# Altium PCB AVRTankPcb.PcbDoc
Units mil, origin at the board's own origin, x right, y up, seen from the top; angles counter-clockwise.
Board outline 2160 x 2180 mil, 2 copper layers (Top Layer, Bottom Layer); 18 components, 14 nets, 59 pads, 0 vias.
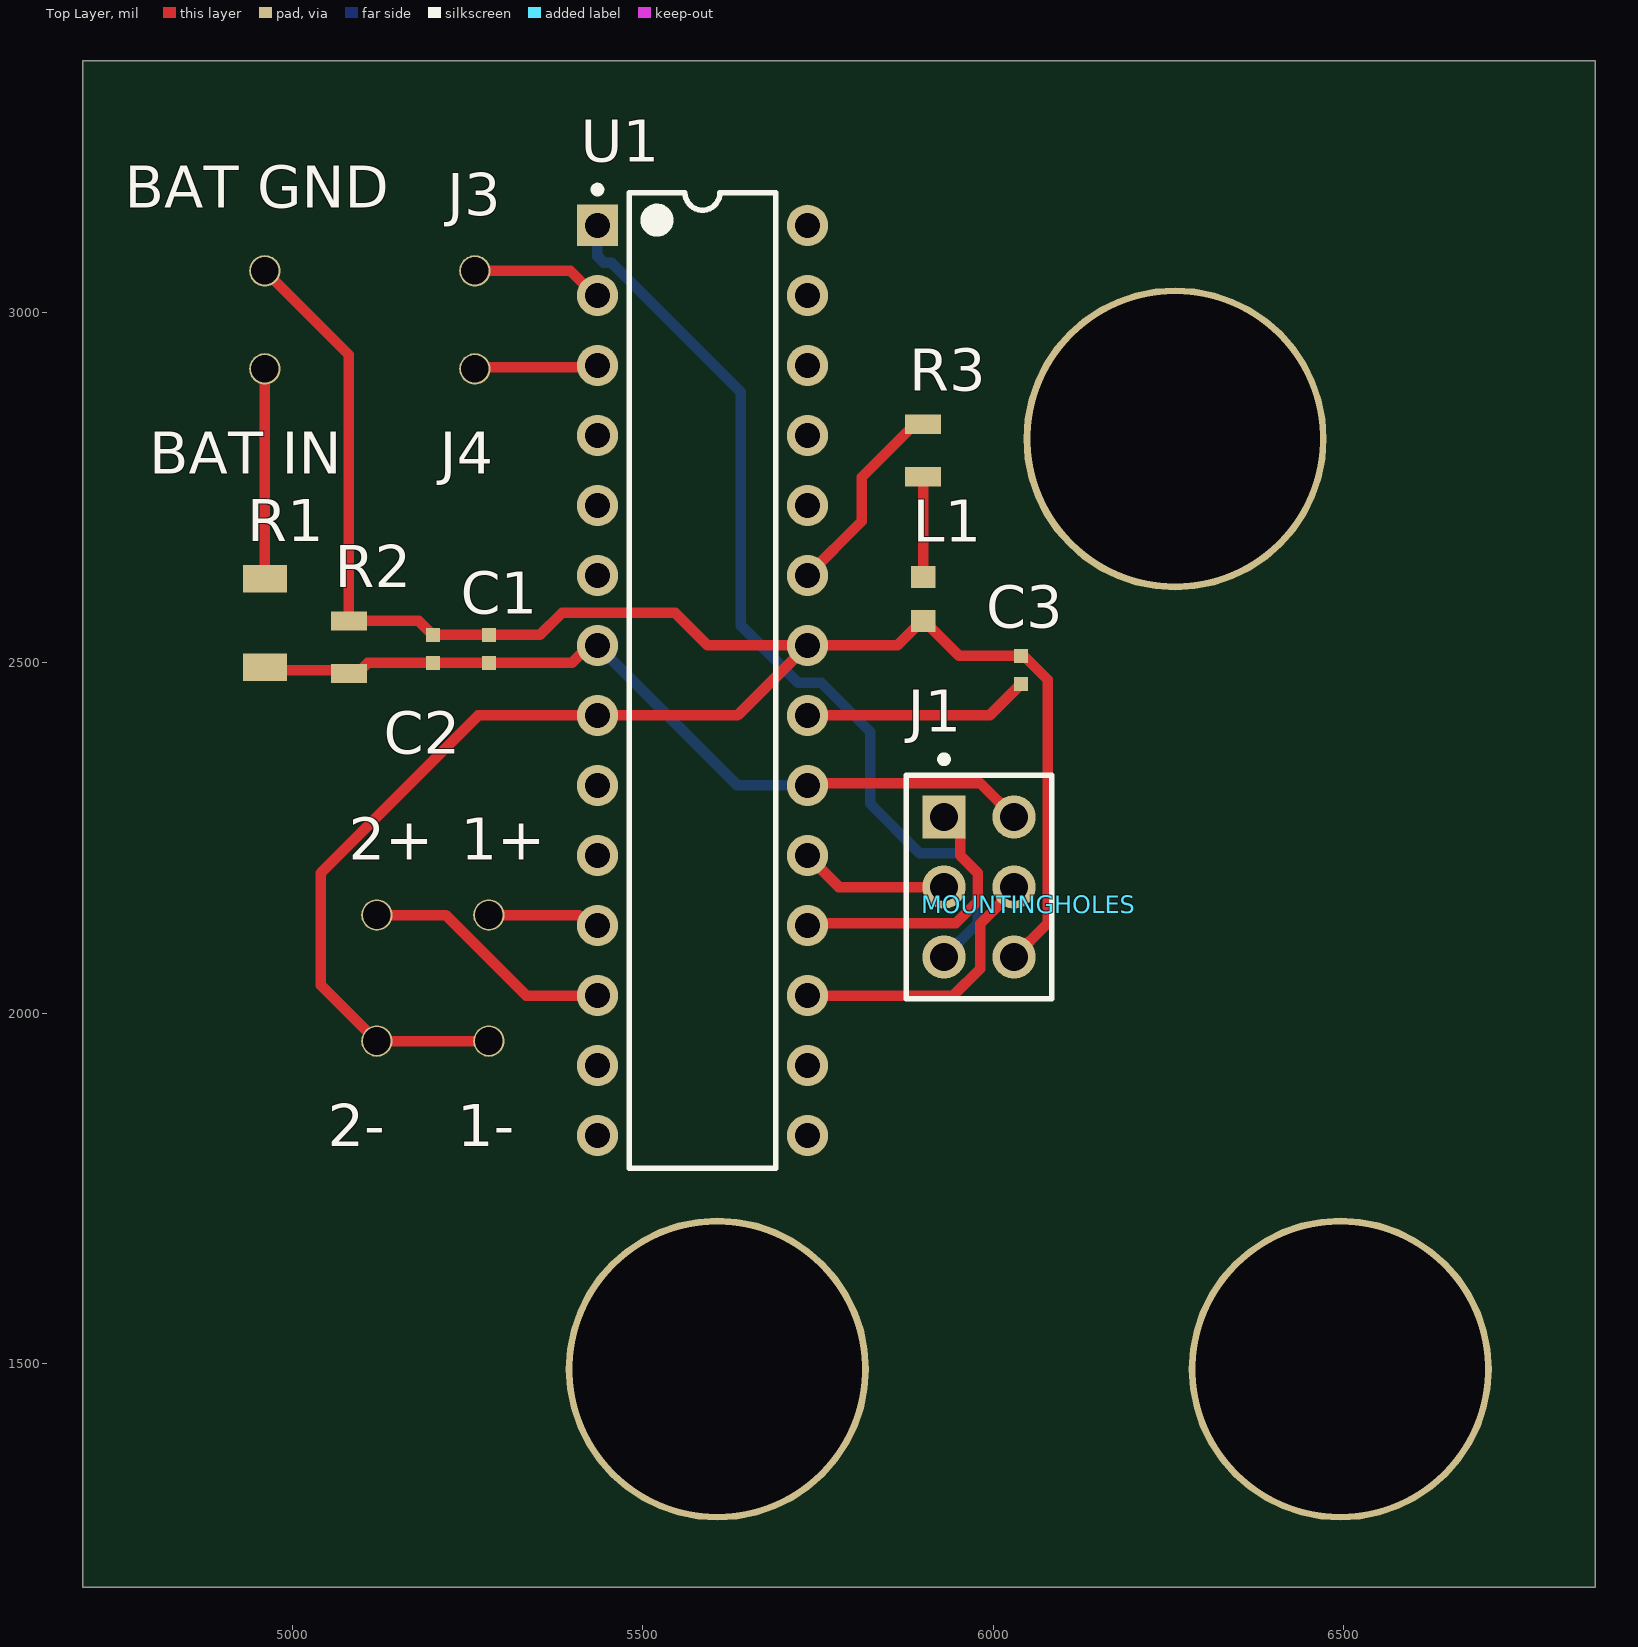
[diagram p0: Top Layer view]
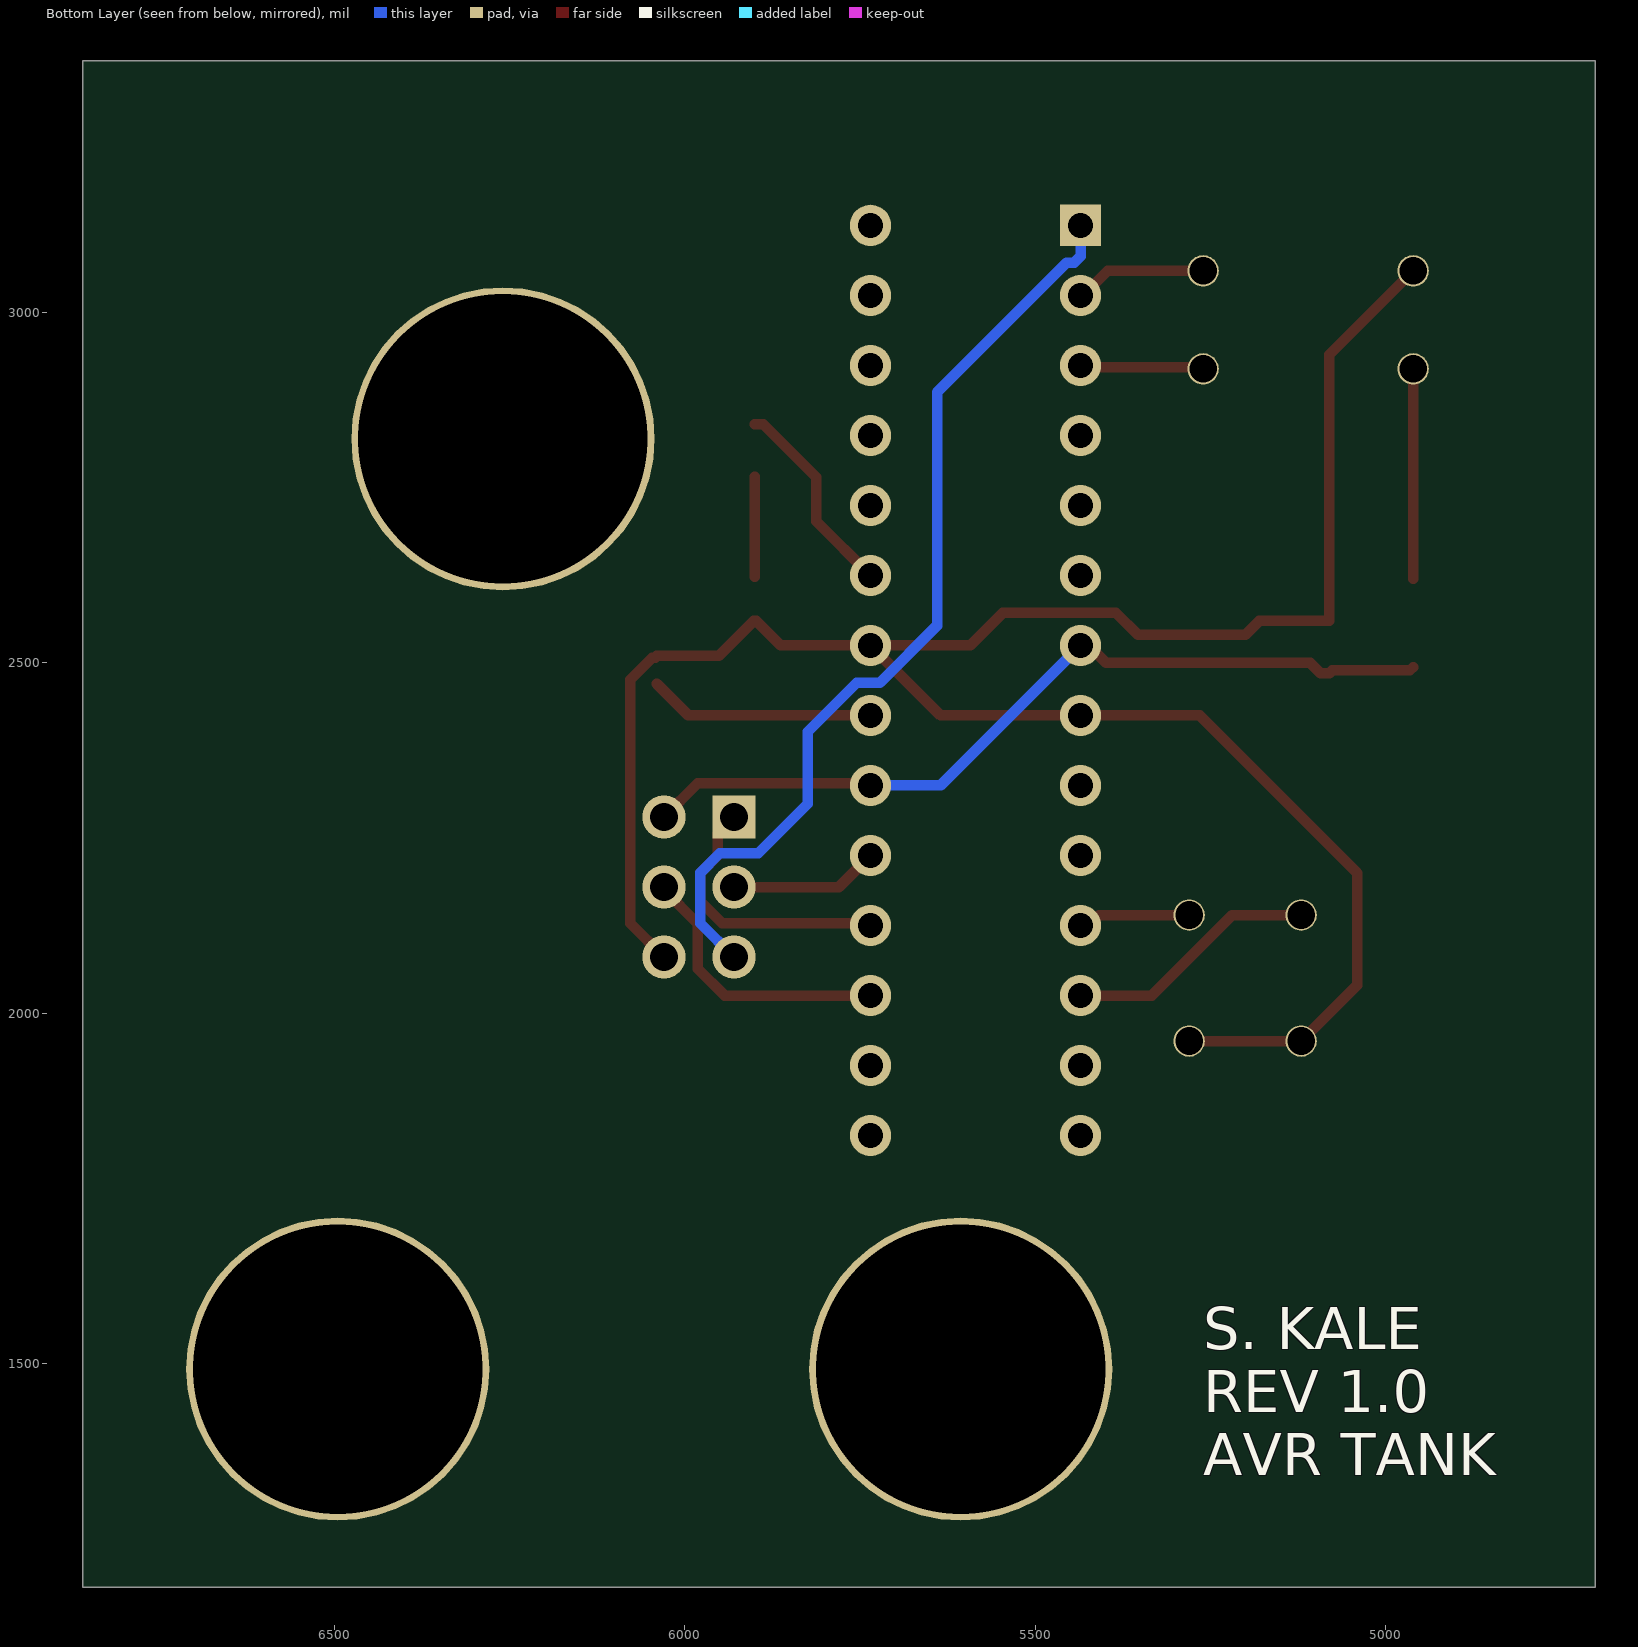
[diagram p1: Bottom Layer view, seen from below]
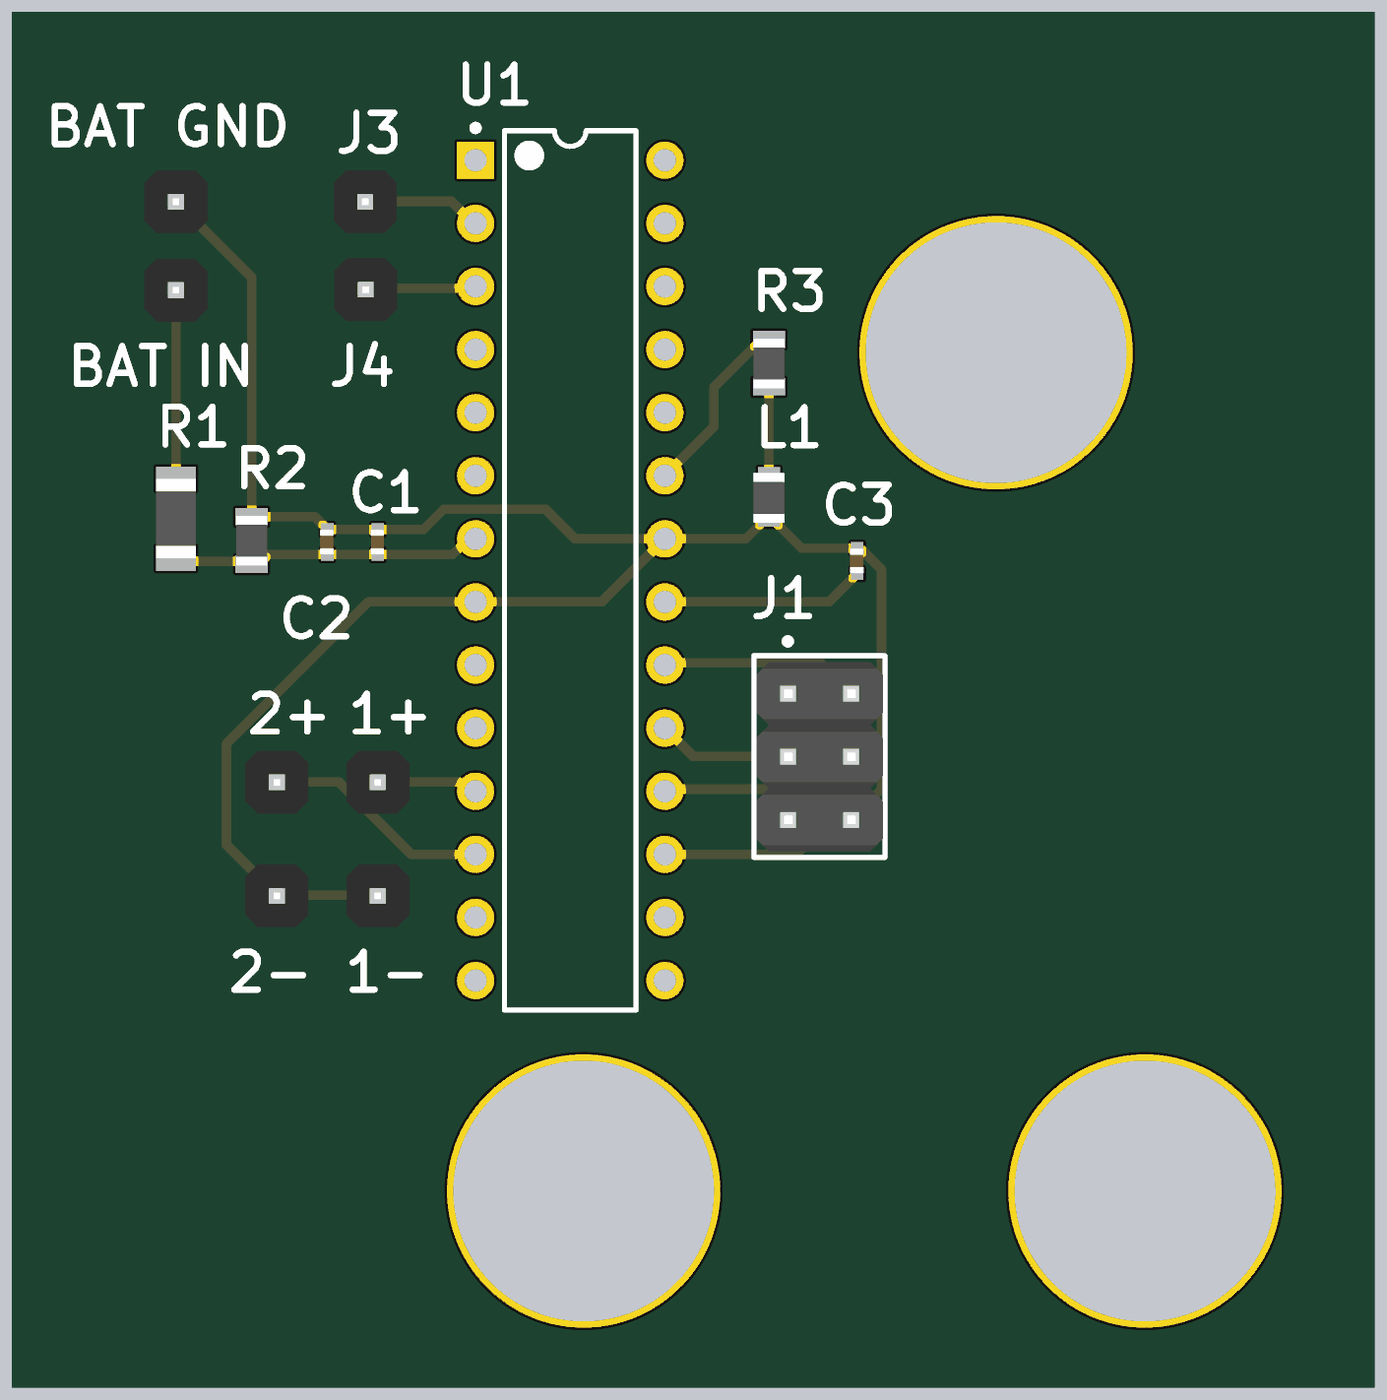
[diagram p2: 3D render of the assembled board from above, using the file's embedded part models]

## Layer stack, top to bottom
Top Solder: solder mask 0.4, Solder Resist, Dk 3.5
Top Layer: signal copper 1.4
Dielectric 1: dielectric 12.6, FR-4, Dk 4.8
Bottom Layer: signal copper 1.4
Bottom Solder: solder mask 0.4, Solder Resist, Dk 3.5

## Board outline
4700,1180 6860,1180 6860,3360 4700,3360

## Design rules (kind name [scope] priority, off if disabled: settings)
Clearance [All] p1: gap=10 ignorepadtopadclearanceinfootprint=FALSE except(0: Arc-Hole Track-Hole SMDPad-Hole THPad-Hole Via-Hole Fill-Hole Poly-Hole Region-Hole Text-Hole)
PolygonConnect [All] p1: connectstyle=Relief reliefconductorwidth=10 reliefentries=4 polygonreliefangle="90 Angle" airgapwidth=10
RoutingVias [All] p1: holewidth=28 width=50 viastyle="Through Hole" minholewidth=28 minwidth=50 maxholewidth=28 maxwidth=50
SolderMaskExpansion [All] p1: expansion=4 istentingtop=FALSE
Width [All] p1: maxlimit=15 minlimit=15 preferedwidth=15 minimp=50.000000 maximp=50.000000 favimp=50.000000
30 further rules are at their usual default settings.

## Components (designator, comment, footprint, x,y, rotation, side; value= is the part's Value field where it differs from the comment)
1+ "MOTOR 1 +" PIN_HEADER 5280,2140 r0 top (schematic designator J7)
1- "MOTOR 1 -" PIN_HEADER 5280,1960 r0 top (schematic designator J8)
2+ "MOTOR 2 +" PIN_HEADER 5120,2140 r0 top (schematic designator J9)
2- "MOTOR 2 -" PIN_HEADER 5120,1960 r0 top (schematic designator J10)
"BAT GND" "BATT GND" PIN_HEADER 4960,3060 r0 top (schematic designator J6)
"BAT IN" "BATT IN" PIN_HEADER 4960,2920 r0 top (schematic designator J5)
C1 "CAP 0.1uF" CAP0.1uF 5280,2510 r90 top
C2 "CAP 0.1uF" CAP0.1uF 5200,2510 r90 top
C3 "CAP 0.1uF" CAP0.1uF 6040,2480 r90 top
J1 "M20-9980346" FP-M20-9980346-MFG 5980,2180 r270 top
J3 "DBG RX" PIN_HEADER 5260,3060 r0 top
J4 "DBG TX" PIN_HEADER 5260,2920 r90 top
L1 "150060GS75000" 150060GS75000 5900,2560 r90 top
MOUNTINGHOLES "MOUNTING HOLES" "MOUNTING HOLES" 6496.22,1481.42 r0 top
R1 "RES 6.8 Ω" "RES 6.8 OHM" 4960,2494.02 r90 top
R2 "RES 30 OHM" "RES 30 OHM" 5080,2498.98 r90 top
R3 "RES 30 Ω" "RES 30 OHM" 5900,2780 r90 top
U1 "ATMEGA328-PU" ATMEGA328-PU 5580,2480 r0 top

## Footprints (in the part's own frame and the unit in brackets; to place one, negate y for a bottom-side part, rotate by r counter-clockwise, add the part's x,y. Pads: shape width x height; smd on the part's side, far side on the other; paste and mask are expansions set on the pad)
150060GS75000 [mm]
  rect 0.8x0.889 smd: 1(0,0) 2(1.6,0)
  body extent -0.24,-0.62 1.76,0.63, height 0.6
ATMEGA328-PU [mm]
  rect 1.5x1.5 hole 0.9: 1(-3.683,16.383)
  round 1.5 hole 0.9: 2(-3.683,13.843) 3(-3.683,11.303) 4(-3.683,8.763) 5(-3.683,6.223) 6(-3.683,3.683) 7(-3.683,1.143) 8(-3.683,-1.397) 9(-3.683,-3.937) 10(-3.683,-6.477) 11(-3.683,-9.017) 12(-3.683,-11.557) 13(-3.683,-14.097) 14(-3.683,-16.637) 15(3.937,-16.637) 16(3.937,-14.097) 17(3.937,-11.557) 18(3.937,-9.017) 19(3.937,-6.477) 20(3.937,-3.937) 21(3.937,-1.397) 22(3.937,1.143) 23(3.937,3.683) 24(3.937,6.223) 25(3.937,8.763) 26(3.937,11.303) 27(3.937,13.843) 28(3.937,16.383)
  silkscreen extent -3.81,-17.83 2.78,17.81, body extent -3.47,-17.78 3.73,17.52, height 4.58
CAP0.1uF [mm]
  rect 0.5x0.5 smd: 1(-0.254,0) 2(0.762,0)
  body extent -0.25,-0.25 0.75,0.3, height 0.48
FP-M20-9980346-MFG [mm]
  rect 1.57x1.57 hole 1.02 paste-1000 mask+0: 1(-2.54,-1.27)
  round 1.57 hole 1.02 paste-1000 mask+0: 2(-2.54,1.27) 3(0,-1.27) 4(0,1.27) 5(2.54,-1.27) 6(2.54,1.27)
  silkscreen extent -4.76,-2.64 4.06,2.64, body extent -4.16,-2.74 4.16,2.74, height 0.25
"MOUNTING HOLES" [mm]
  round 11 hole 10.5: 8(-22.606,0.254) 9(-6,34) 9(-0.006,0.254)
PIN_HEADER [mil]
  round 45 hole 39.37: 1(0,0)
  body extent -50,-51 50,49, height 330
"RES 6.8 OHM" [mm]
  rect 1x1.6 smd: 1(0,0) 2(3.2,0)
  body extent 0,-0.8 3.2,0.8, height 0.7
"RES 30 OHM" [mm]
  rect 0.7x1.3 smd: 1(1.55,0) 2(-0.356,0)
  body extent -0.42,-0.62 1.58,0.63, height 0.6

## Part data
1+ 1- 2+ 2- "BAT GND" "BAT IN" J3 J4: library part PIN_HEADER, "Board Connector, 1 Contact(s), 1 Row(s), Male, Straight, Solder Terminal", Flammability Rating="UL94 V-0", Manufacturer=Sullins, Manufacturer Part Number=PREC001SAAN-RC, Supplier Part Number 1=S1012EC-01-ND, Category=Connectors, ComponentLink1Description=https://datasheet.ciiva.com:443/pdfs/VipMasterIC/IC/SUCS/SUCS-S-A0005121173/SUCS-S-A0005121173-1.pdf?src-supplier=IHS+Markit, ComponentLink1URL=https://datasheet.ciiva.com:443/pdfs/VipMasterIC/IC/SUCS/SUCS-S-A0005121173/SUCS-S-A0005121173-1.pdf?src-supplier=IHS+Markit, ComponentLink2Description=https://datasheet.ciiva.com/740/zrzczzzszzn-rc-st-11635-b-740844.pdf?src-supplier=Digi-Key, ComponentLink2URL=https://datasheet.ciiva.com/740/zrzczzzszzn-rc-st-11635-b-740844.pdf?src-supplier=Digi-Key, Connector Type="BOARD CONNECTOR", Contact Gender=Male, DIN Conformance=No, Filter Feature=No, IEC Conformance=No, MIL Conformance=No, Mixed Contacts=No, Mount=Board, Mounting Style=STRAIGHT, Number Of Contacts=1, Number of Rows Loaded=1, Option="General Purpose", Pricing 1="1=0.04000, 10=0.03000, 25=0.02800, 50=0.02080, 100=0.01780, 250=0.01724, 500=0.01486 (USD)", RoHS=Yes, Stock 1=16681, Supplier 1=Digi-Key, Termination=Solder
C1 C2 C3: "Ceramic Capacitor, Multilayer, Ceramic, 16V, 10% +Tol, 10% -Tol, X7R, 15% TC, 0.1uF, Surface Mount, 0402", Capacitance=100nF, Capacitor Type=Ceramic, Manufacturer=Murata, Manufacturer Part Number=GRM155R71C104KA88D, Max Operating Temperature=125°C, Min Operating Temperature=-55°C, Negative Tolerance=10%, Package Shape=Rectangular, Package Style=SMTMeter, Rated DC Voltage (URdc)=16V, Supplier Part Number 1=490-3261-1-ND, Temperature Characteristics Code=X7R, Category="Ceramic Capacitors", ComponentLink1Description=https://psearch.en.murata.com:443/capacitor/product/GRM155R71C104KA88%23.pdf?src-supplier=IHS+Markit, ComponentLink1URL=https://psearch.en.murata.com:443/capacitor/product/GRM155R71C104KA88%23.pdf?src-supplier=IHS+Markit, ComponentLink2Description=https://datasheet.ciiva.com/129/grm155r71c104ka88-01-129740.pdf?src-supplier=Digi-Key, ComponentLink2URL=https://datasheet.ciiva.com/129/grm155r71c104ka88-01-129740.pdf?src-supplier=Digi-Key, ComponentLink3Description=https://datasheet.ciiva.com/18102/getdatasheetpartid-85307-18102905.pdf?src-supplier=Verical, ComponentLink3URL=https://datasheet.ciiva.com/18102/getdatasheetpartid-85307-18102905.pdf?src-supplier=Verical, ComponentLink4Description=https://datasheet.ciiva.com/129/grm155r71c104ka88-01-129739.pdf?src-supplier=Digi-Key, ComponentLink4URL=https://datasheet.ciiva.com/129/grm155r71c104ka88-01-129739.pdf?src-supplier=Digi-Key, ComponentLink5Description=https://datasheet.ciiva.com/29199/454098-da-01-en-vs-kondensator-0402-29199799.pdf?src-supplier=Conrad, ComponentLink5URL=https://datasheet.ciiva.com/29199/454098-da-01-en-vs-kondensator-0402-29199799.pdf?src-supplier=Conrad, ComponentLink6Description=https://datasheet.ciiva.com/28534/4360-28534133.pdf?src-supplier=Element14, ComponentLink6URL=https://datasheet.ciiva.com/28534/4360-28534133.pdf?src-supplier=Element14, ComponentLink7Description=https://datasheet.ciiva.com/14103/grmseries-highdielectrictype-eng-14103750.pdf?src-supplier=Distrelec, ComponentLink7URL=https://datasheet.ciiva.com/14103/grmseries-highdielectrictype-eng-14103750.pdf?src-supplier=Distrelec, ComponentLink8Description=https://datasheet.ciiva.com/16199/product-16199000.pdf?src-supplier=Future+Electronics, ComponentLink8URL=https://datasheet.ciiva.com/16199/product-16199000.pdf?src-supplier=Future+Electronics, ComponentLink9Description=https://datasheet.ciiva.com/14116/grmseries-highdielectrictype-eng-14116878.pdf?src-supplier=Distrelec, ComponentLink9URL=https://datasheet.ciiva.com/14116/grmseries-highdielectrictype-eng-14116878.pdf?src-supplier=Distrelec, ComponentLink10Description=https://datasheet.ciiva.com/7937/4360-7937615.pdf?src-supplier=Element14, ComponentLink10URL=https://datasheet.ciiva.com/7937/4360-7937615.pdf?src-supplier=Element14, ComponentLink11Description=https://datasheet.ciiva.com/28534/4360-28534127.pdf?src-supplier=Element14, ComponentLink11URL=https://datasheet.ciiva.com/28534/4360-28534127.pdf?src-supplier=Element14, Dielectric Material=Ceramic, Height=0.5mm, JESD-609 Code=e3, Length=1mm, Mount="Surface Mount", Multilayer=Yes, Number of Pins=2, Packaging="Tape and Reel", Positive Tolerance=10%, Pricing 1="1=0.10000, 10=0.02100, 50=0.01140, 100=0.00930, 500=0.00666, 1000=0.00523, 2500=0.00476, 5000=0.00438 (USD)", RoHS=Yes, Size Code=0402, Stock 1=19996896, Supplier 1=Digi-Key, Terminal Finish=Nickel, Termination=Wraparound, Width=0.5mm
J1: library part CMP-2000-06636-2, "CONN HEADER VERT 6POS 2.54MM", Current Rating=3A, Manufacturer=Harwin, Temperature="-40°C to +105°C", Temperature Range High=+105°C, Temperature Range Low=-40°C, Automotive=No, Category=Conn, ComponentLink2Description=Datasheet, ComponentLink2URL=https://cdn.harwin.com/pdfs/M20-998.pdf, Conn Gender=Male, Conn Orientation=Vertical, Contact Material=Tin,Nickel, Device Class L1=Connectors, Device Class L2="Headers and Wire Housings", Device Class L3=unset, Digikey Description="CONN HEADER VERT 6POS 2.54MM", Height=8.99mm, Lead Free=Yes, Manufacturer Part Number=M20-9980346, Mouser Description="2.54mm (0.1\") Pitch DIL Vertical PC Tail Pin Header, 6.1mm mating pin height, tin, 3+3 contacts", Number Of Contacts=6, Number Of Rows=2, Octopart=https://octopart.com/m20-9980346-harwin-5436545, Package=M20-9980346, Pitch=2.54mm, RoHS=TRUE
L1: library part "LED Orange SMD", "Single Color LED, Green, Water Clear, 1.1mm", Color=Green, Forward Current-Max=30mA, Manufacturer="Wurth Electronics", Max Operating Temperature=85°C, Min Operating Temperature=-40°C, Supplier Part Number 1=732-4971-1-ND, Category=LEDs, ComponentLink1Description=https://datasheet.ciiva.com:443/pdfs/VipMasterIC/IC/MIDC/MIDC-S-A0007790169/MIDC-S-A0007790169-1.pdf?src-supplier=IHS+Markit, ComponentLink1URL=https://datasheet.ciiva.com:443/pdfs/VipMasterIC/IC/MIDC/MIDC-S-A0007790169/MIDC-S-A0007790169-1.pdf?src-supplier=IHS+Markit, ComponentLink2Description=https://datasheet.ciiva.com/29562/150060gs75000-29562868.pdf?src-supplier=Digi-Key, ComponentLink2URL=https://datasheet.ciiva.com/29562/150060gs75000-29562868.pdf?src-supplier=Digi-Key, ComponentLink3Description=https://datasheet.ciiva.com/29279/759427-da-01-en-chipled-0603-w-kl-gruen-150060gs75000-29279201.pdf?src-supplier=Conrad, ComponentLink3URL=https://datasheet.ciiva.com/29279/759427-da-01-en-chipled-0603-w-kl-gruen-150060gs75000-29279201.pdf?src-supplier=Conrad, ComponentLink4Description=https://datasheet.ciiva.com/29562/150060gs75000-29562869.pdf?src-supplier=Digi-Key, ComponentLink4URL=https://datasheet.ciiva.com/29562/150060gs75000-29562869.pdf?src-supplier=Digi-Key, ComponentLink5Description=https://datasheet.ciiva.com/29562/150060gs75000-29562870.pdf?src-supplier=Digi-Key, ComponentLink5URL=https://datasheet.ciiva.com/29562/150060gs75000-29562870.pdf?src-supplier=Digi-Key, Lens Style="WATER CLEAR", Luminous Intensity-Nom=430mcd, Manufacturer Part Number=150060GS75000, Mount="Surface Mount", Number of Functions=1, Number of Pins=2, Optoelectronic Device Type="SINGLE COLOR LED", Overall Height=0.7mm, Packaging="Tape and Reel", Pricing 1="1=0.14000, 50=0.13300, 100=0.11400, 500=0.09900 (USD)", RoHS=Yes, Shape=Rectangular, Size=1.1mm, Stock 1=86159, Supplier 1=Digi-Key, Terminal Pitch=1.6mm, Viewing Angle=140°
R1: "Fixed Resistor, Metal Glaze/thick Film, 0.25W, 6.8ohm, 200V, 5% +/-Tol, 200ppm/Cel, Surface Mount, 1206", Manufacturer="Stackpole Electronics", Manufacturer Part Number=RMCF1206JT6R80, Max Operating Temperature=155°C, Min Operating Temperature=-55°C, Package Height=0.55mm, Package Length=3.2mm, Package Shape=Rectangular, Package Style=SMTMeter, Package Width=1.6mm, Rated Power Dissipation (P)=250mW, Rated Temperature=70°C, Resistance=6.8R, Resistor Type="FIXED RESISTOR", Supplier Part Number 1=RMCF1206JT6R80CT-ND, Temperature Coefficient=200ppm/°C, Tolerance=5%, Working Voltage=200V, Category="Chip SMD Resistors", ComponentLink1Description=https://datasheet.ciiva.com:443/pdfs/VipMasterIC/IC/SEIE/SEIE-S-A0009541969/SEIE-S-A0009541969-1.pdf?src-supplier=IHS+Markit, ComponentLink1URL=https://datasheet.ciiva.com:443/pdfs/VipMasterIC/IC/SEIE/SEIE-S-A0009541969/SEIE-S-A0009541969-1.pdf?src-supplier=IHS+Markit, ComponentLink2Description=http://components.arrow.com/part/dataview/44988312S9337764N1174?src-supplier=Arrow+Electronics, ComponentLink2URL=http://components.arrow.com/part/dataview/44988312S9337764N1174?src-supplier=Arrow+Electronics, ComponentLink3Description=https://www.verical.com/server-webapp/html/getDatasheet?partID=365394&src-supplier=Verical, ComponentLink3URL=https://www.verical.com/server-webapp/html/getDatasheet?partID=365394&src-supplier=Verical, ComponentLink4Description=https://www.seielect.com/catalog/SEI-RMCF_RMCP.pdf?src-supplier=Avnet, ComponentLink4URL=https://www.seielect.com/catalog/SEI-RMCF_RMCP.pdf?src-supplier=Avnet, ComponentLink5Description=http://www.seielect.com/Catalog/SEI-RMCF_RMCP.pdf?src-supplier=Digi-Key, ComponentLink5URL=http://www.seielect.com/Catalog/SEI-RMCF_RMCP.pdf?src-supplier=Digi-Key, ComponentLink6Description=https://www.seielect.com/Catalog/SEI-RMCF_RMCP.pdf?src-supplier=Digi-Key, ComponentLink6URL=https://www.seielect.com/Catalog/SEI-RMCF_RMCP.pdf?src-supplier=Digi-Key, ComponentLink7Description=https://www.seielect.com/catalog/SEI-Packaging.pdf?src-supplier=Digi-Key, ComponentLink7URL=https://www.seielect.com/catalog/SEI-Packaging.pdf?src-supplier=Digi-Key, Construction=Rectangular, JESD-609 Code=e3, Mount="Surface Mount", Number of Pins=2, Packaging="Tape and Reel", Pricing 1="1=0.10000, 10=0.02900, 100=0.01180, 1000=0.00530, 2500=0.00460 (USD)", Reference Standard=AEC-Q200, RoHS=Yes, Size Code=1206, Stock 1=965, Supplier 1=Digi-Key, Technology="METAL GLAZE/THICK FILM", Terminal Finish=Nickel, Termination=Wraparound
R2 R3: "Fixed Resistor, Metal Glaze/thick Film, 0.125W, 30ohm, 150V, 1% +/-Tol, 100ppm/Cel, Surface Mount, 0805", Manufacturer="Vishay Dale", Manufacturer Part Number=CRCW080530R0FKEAC, Max Operating Temperature=155°C, Min Operating Temperature=-55°C, Package Height=0.5mm, Package Length=2mm, Package Style=SMTMeter, Package Width=1.25mm, Rated Power Dissipation (P)=125mW, Resistance=30R, Resistor Type="FIXED RESISTOR", Supplier Part Number 1=541-4153-1-ND, Temperature Coefficient=-100100ppm/°C, Tolerance=1%, Working Voltage=150V, ComponentLink1Description=https://datasheet.ciiva.com:443/pdfs/VipMasterIC/IC/VISH/VISH-S-A0003599164/VISH-S-A0003599164-1.pdf?src-supplier=IHS+Markit, ComponentLink1URL=https://datasheet.ciiva.com:443/pdfs/VipMasterIC/IC/VISH/VISH-S-A0003599164/VISH-S-A0003599164-1.pdf?src-supplier=IHS+Markit, Construction=Chip, JESD-609 Code=e3, Number of Pins=2, Packaging="Tape and Reel", Pricing 1="1=0.10000, 10=0.05400, 100=0.02210, 1000=0.00994, 2500=0.00862 (USD)", RoHS=No, Size Code=0805, Stock 1=71663, Supplier 1=Digi-Key, Technology="METAL GLAZE/THICK FILM", Terminal Finish=Nickel
U1: "RISC Microcontroller, 8-Bit, FLASH, AVR RISC CPU, 20MHz, CMOS, PDIP28", Manufacturer="Microchip / Atmel", Max Frequency=20MHz, Max Operating Temperature=85°C, Max Supply Current=12mA, Max Supply Voltage=5.5V, Min Operating Temperature=-40°C, Min Supply Voltage=4.5V, Package Body Material=Plastic, Package Code=DIP, Package Equivalence Code=DIP28,.3, Package Shape=Rectangular, Package Style=IN-LINEMeter, Power Supplies=2.5V, Supplier Part Number 1=ATMEGA328-PU-ND, Supply Voltage-Nom=5V, Temperature Grade=INDUSTRIAL, Category=Microcontrollers, ComponentLink1Description=https://datasheet.ciiva.com:443/pdfs/VipMasterIC/IC/ATML/ATML-S-A0002642585/ATML-S-A0002642585-1.pdf?src-supplier=IHS+Markit, ComponentLink1URL=https://datasheet.ciiva.com:443/pdfs/VipMasterIC/IC/ATML/ATML-S-A0002642585/ATML-S-A0002642585-1.pdf?src-supplier=IHS+Markit, ComponentLink2Description=https://datasheet.ciiva.com/20168/73-4281-20168377.pdf?src-supplier=Rapid+Electronics, ComponentLink2URL=https://datasheet.ciiva.com/20168/73-4281-20168377.pdf?src-supplier=Rapid+Electronics, ComponentLink3Description=https://datasheet.ciiva.com/1157/1684409-1157692.pdf?src-supplier=Element14, ComponentLink3URL=https://datasheet.ciiva.com/1157/1684409-1157692.pdf?src-supplier=Element14, Height - Seated (Max)=4.5724mm, JESD-30 Code=R-PDIP-T28, Length=34.671mm, Manufacturer Part Number=ATMEGA328-PU, Number of I/O Lines=23, Number of Pins=28, Pricing 1="1=1.90000, 25=1.74000, 100=1.58000 (USD)", Qualification Status="Not Qualified", RoHS=Yes, Speed=20RPM, Stock 1=2722, Supplier 1=Digi-Key, Surface Mount=No, Technology=CMOS, Terminal Form="Through Hole", Terminal Pitch=2.54mm, Terminal Position=DUAL, Width=7.62mm

## Nets (pads, with @x,y where several pads share a name; then routed paths per layer and width w, separated by ;. In a path a pad name is that pad's centre, name@x,y a point inside that pad or via, vN(x,y) a via of type N, cw(c..) or ccw(c..) an arc to the next point about the centre after c; other vN are vias at no path point)
+5: C1.1 C2.1 J1.2 R1.1 R2.2 U1.7 U1.20 | length 1194.6
  Top Layer w15: R1.1 4964.52,2489.5 5075.48,2489.5 R2.2 5091.81,2484.98 5106.83,2500 C2.1 C1.1 5398.08,2500 5423.08,2525 U1.7 ; U1.20 5738.41,2328.41 5981.59,2328.41 J1.2
  Bottom Layer w15: U1.7 5635,2325 U1.20
GND: 1-.1 2-.1 "BAT GND.1" C1.2 C2.2 C3.2 J1.6 L1.1 R2.1 U1.8 U1.22 | length 3317.3
  Top Layer w15: 4960,3060 5080,2940 R2.1 5180,2560 C2.2 C1.2 5352.4,2540 5384.42,2572.03 5545.79,2572.03 5592.81,2525 U1.22 ; 1-.1 2-.1 5040,2040 5040,2200 5265,2425 U1.8 5635,2425 U1.22 ; J1.6 6078.41,2128.41 6078.41,2476.03 6046.78,2507.66 6042.34,2507.66 C3.2 5951.75,2510 5901.75,2560 L1.1 5898.25,2560 5863.25,2525 U1.22
NetC3_1: C3.1 U1.21 | length 323.6
  Top Layer w15: U1.21 5995,2425 C3.1
NetJ1_1: J1.1 U1.18 | length 398
  Top Layer w15: U1.18 5738.41,2128.41 5946.86,2128.41 5978.41,2159.95 5978.41,2200.05 5953.41,2225.05 5953.41,2256.59 J1.1
NetJ1_3: J1.3 U1.19 | length 213.6
  Top Layer w15: U1.19 5780,2180 J1.3
NetJ1_4: J1.4 U1.17 | length 399.3
  Top Layer w15: U1.17 5943.46,2025 5981.59,2063.14 5981.59,2127.78 6030,2176.19 J1.4
NetJ1_5: J1.5 U1.1 | length 1348
  Bottom Layer w15: U1.1 5435,3080.81 5443.79,3072.03 5454.48,3072.03 5640,2886.51 5640,2553.49 5721.47,2472.03 5754.48,2472.03 5824.76,2401.75 5824.76,2298.68 5895.03,2228.41 5950.05,2228.41 5978.41,2200.05 5978.41,2128.41 J1.5
NetJ3_1: J3.1 U1.2 | length 189.5
  Top Layer w15: J3.1 5396.42,3060 5431.42,3025 U1.2
NetJ4_1: J4.1 U1.3 | length 177.1
  Top Layer w15: J4.1 5262.5,2922.5 5432.5,2922.5 U1.3
NetJ5_1: "BAT IN.1" R1.2 | length 300
  Top Layer w15: R1.2 4960,2920
NetJ7_1: 1+.1 U1.11 | length 161.2
  Top Layer w15: 1+.1 5408.08,2140 5423.08,2125 U1.11
NetJ9_1: 2+.1 U1.12 | length 362.6
  Top Layer w15: 2+.1 5218.1,2140 5333.1,2025 U1.12
NetL1_2: L1.2 R3.2 | length 143
  Top Layer w15: L1.2 R3.2
NetR3_1: R3.1 U1.23 | length 291.3
  Top Layer w15: U1.23 5812.67,2702.67 5812.67,2765.5 5888.19,2841.02 R3.1
pads on no net: MOUNTINGHOLES.8 MOUNTINGHOLES.9 U1.4 U1.5 U1.6 U1.9 U1.10 U1.13 U1.14 U1.15 U1.16 U1.24 U1.25 U1.26 U1.27 U1.28

## Silkscreen, mask and mechanical layers (free items; w line width, h text height)
Top Overlay:
  text "String" at 2830,2489.99 h60
Bottom Overlay:
  text "S. KALE / REV 1.0 / AVR TANK" at 5260,1340 h60